# Altium PCB Copy of PCB1.PcbDoc
Units mm, origin at the board's own origin, x right, y up, seen from the top; angles counter-clockwise.
Board outline 75 x 30 mm, 2 copper layers (Top Layer, Bottom Layer); 15 components, 9 nets, 61 pads, 11 vias.
Unrouted connection lines stored in the file: 8.
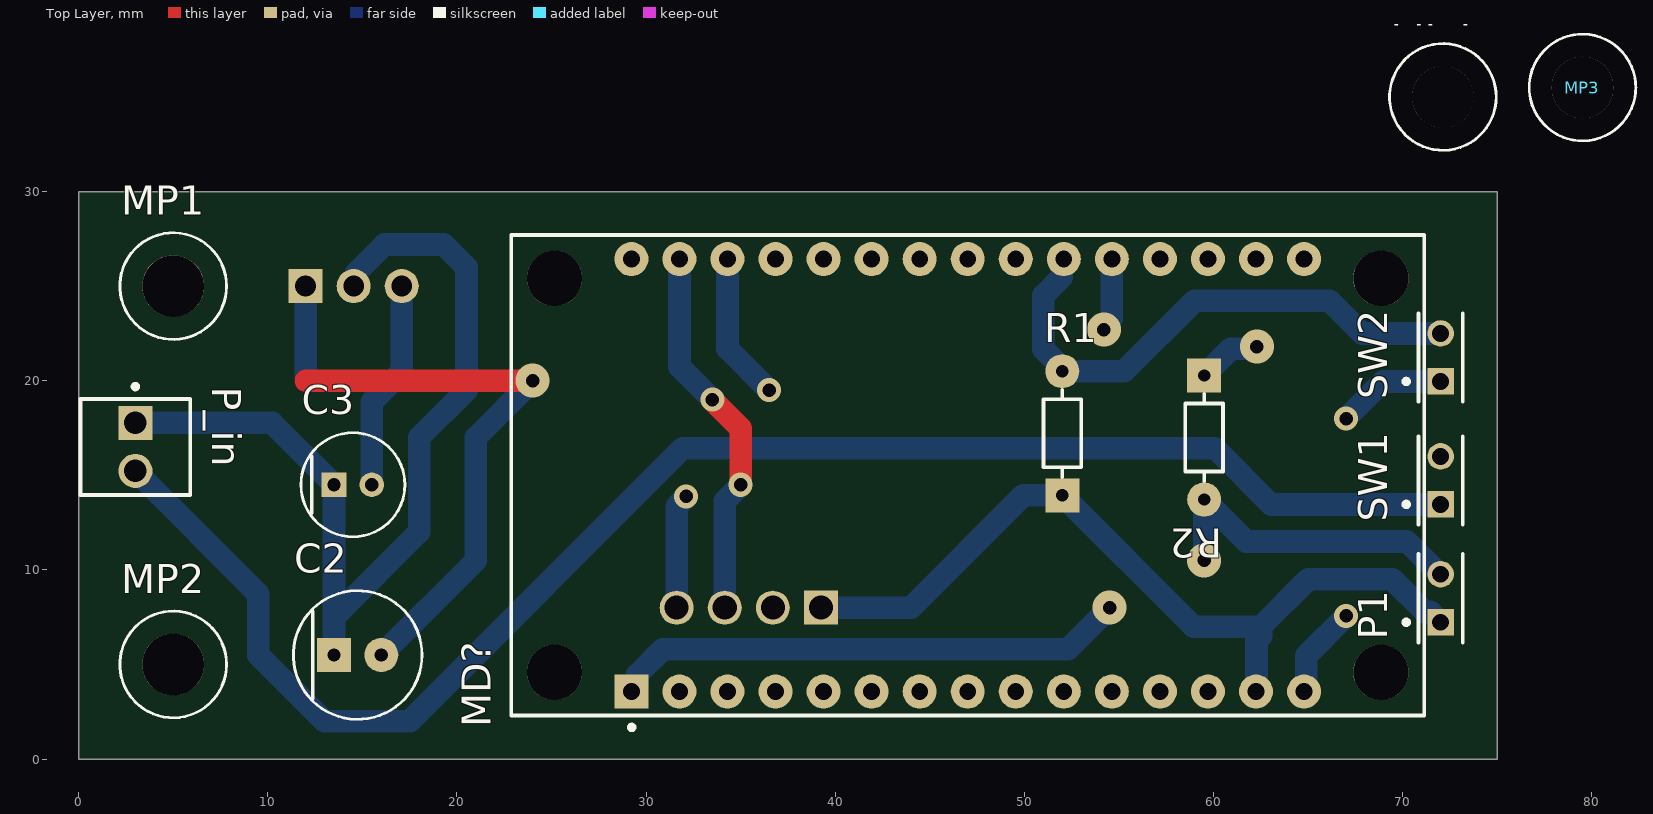
[diagram p0: Top Layer view]
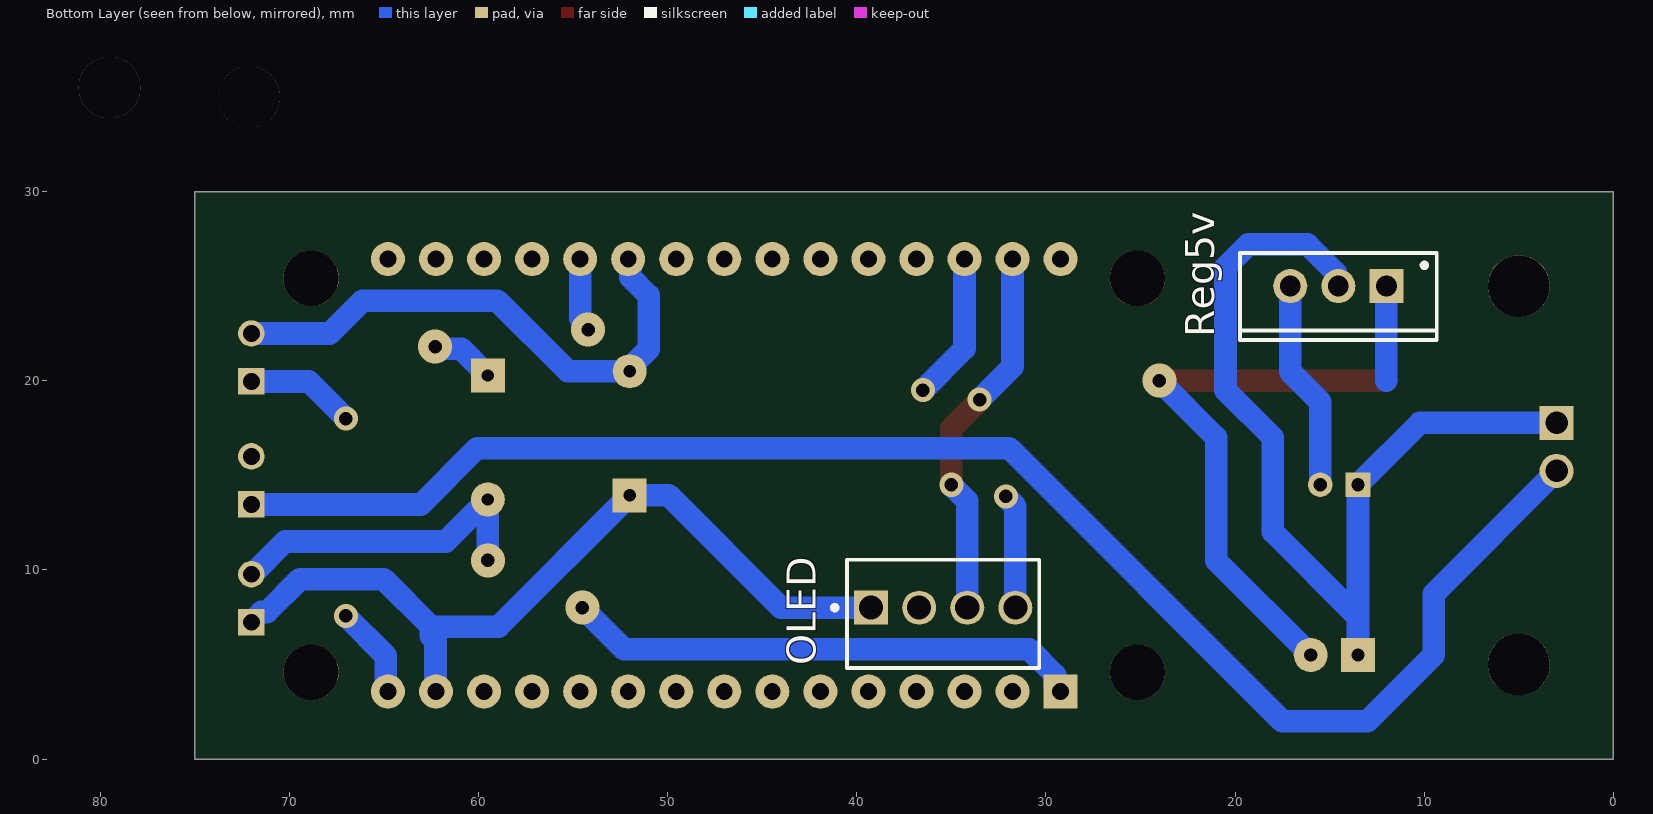
[diagram p1: Bottom Layer view, seen from below]

## Layer stack, top to bottom
Top Solder: solder mask 0.0102, Solder Resist, Dk 3.5
Top Layer: signal copper 0.0356
Dielectric 1: dielectric 0.32, FR-4, Dk 4.8
Bottom Layer: signal copper 0.0356
Bottom Solder: solder mask 0.0102, Solder Resist, Dk 3.5

## Board outline
0,0 75,0 75,30 0,30

## Design rules (kind name [scope] priority, off if disabled: settings)
Clearance [All] p1: gap=0.7 ignorepadtopadclearanceinfootprint=FALSE
PolygonConnect [All] p1: connectstyle=Relief reliefconductorwidth=0.254 reliefentries=4 polygonreliefangle="90 Angle" airgapwidth=0.254
RoutingVias [All] p1: holewidth=0.711 width=1.27 viastyle="Through Hole" minholewidth=0.711 minwidth=1.27 maxholewidth=0.711 maxwidth=1.27
SolderMaskExpansion [All] p1: expansion=0.102 istentingtop=FALSE
Width [All] p1: maxlimit=2 minlimit=1 preferedwidth=1.2
30 further rules are at their usual default settings.

## Components (designator, comment, footprint, x,y, rotation, side; value= is the part's Value field where it differs from the comment)
C2 "4.7uF" FP-RAD-TH-D_6_3_0_5-L_11-MFG 14.75,5.5 r0 top
C3 "10uF" FP-RAD-TH-D_5_0_5-L_11_1-MFG 14.5,14.5 r0 top
MD? "113990105" FP-113990105-MFG 47,15 r90 top
MP1 "9901" FP-9901-MFG 5,25 r0 top
MP2 "9901" FP-9901-MFG 5,5 r0 top
MP3 "9901" FP-9901-MFG 79.5,35.5 r0 top
MP4 "9901" FP-9901-MFG 72.119,35 r0 top
OLED "6" TECO-640456-4 35.426,8 r0 bottom
P1 "5-146280-2" TECO-5-146280-2_V 72,8.5 r90 top
P_in "9V" MOLX-22-27-2021_V 3,16.5 r270 top
R1 "10k" FP-CF18-MFG 52,17.22 r90 top value=10kΩ
R2 "10k" FP-CF18-MFG 59.5,17 r270 top value=10kΩ
Reg5v "5V" TO220 14.54,25 r0 bottom
SW1 "5-146280-2" TECO-5-146280-2_V 72,14.73 r90 top
SW2 "5-146280-2" TECO-5-146280-2_V 72,21.23 r90 top

## Footprints (in the part's own frame and the unit in brackets; to place one, negate y for a bottom-side part, rotate by r counter-clockwise, add the part's x,y. Pads: shape width x height; smd on the part's side, far side on the other; paste and mask are expansions set on the pad)
FP-9901-MFG [mil]
  round 128.5 hole 128.5 unplated paste-39370.1 mask+0: ""(0,0)
  silkscreen extent -111,-111 111,111, body extent -115,-115 115,115, height 10
FP-113990105-MFG [mm]
  rect 1.8x1.8 hole 0.889 paste-1000 mask+0: 1(-11.43,17.78)
  round 1.8 hole 0.889 paste-1000 mask+0: 2(-11.43,15.24) 3(-11.43,12.7) 4(-11.43,10.16) 5(-11.43,7.62) 6(-11.43,5.08) 7(-11.43,2.54) 8(-11.43,0) 9(-11.43,-2.54) 10(-11.43,-5.08) 11(-11.43,-7.62) 12(-11.43,-10.16) 13(-11.43,-12.7) 14(-11.43,-15.24) 15(-11.43,-17.78) 16(11.43,-17.78) 17(11.43,-15.24) 18(11.43,-12.7) 19(11.43,-10.16) 20(11.43,-7.62) 21(11.43,-5.08) 22(11.43,-2.54) 23(11.43,0) 24(11.43,2.54) 25(11.43,5.08) 26(11.43,7.62) 27(11.43,10.16) 28(11.43,12.7) 29(11.43,15.24) 30(11.43,17.78)
  round 2.921 hole 2.921 unplated paste-1000 mask+0: ""(-10.414,21.844) ""(-10.414,-21.844) ""(10.414,21.844) ""(10.414,-21.844)
  silkscreen extent -13.45,-24.13 12.7,24.13, body extent -12.99,-24.85 12.99,24.34, height 0.25
FP-CF18-MFG [mm]
  rect 1.8x1.8 hole 0.65 paste-1000 mask+0: 1(-3.28,0)
  round 1.8 hole 0.65 paste-1000 mask+0: 2(3.28,0)
  silkscreen extent -2.3,-1 2.3,1, body extent -3.96,-1.1 3.96,1.1, height 0.25
FP-RAD-TH-D_5_0_5-L_11_1-MFG [mm]
  rect 1.3x1.3 hole 0.7 paste-1000 mask+0: 1(-1,0)
  round 1.3 hole 0.7 paste-1000 mask+0: 2(1,0)
  silkscreen extent -2.75,-2.75 2.75,2.75, body extent -2.85,-2.85 2.85,2.85, height 0.25
FP-RAD-TH-D_6_3_0_5-L_11-MFG [mm]
  rect 1.8x1.8 hole 0.7 paste-1000 mask+0: 1(-1.25,0)
  round 1.8 hole 0.7 paste-1000 mask+0: 2(1.25,0)
  silkscreen extent -3.4,-3.4 3.4,3.4, body extent -3.5,-3.5 3.5,3.5, height 0.25
MOLX-22-27-2021_V [mm] "Header, 2-Leads, Body 5.8x5.08mm"
  rect 1.8x1.8 hole 1.19: 1(-1.27,0)
  round 1.8 hole 1.19: 2(1.27,0)
  silkscreen extent -3.31,-2.9 2.54,2.9, body extent -2.54,-2.9 2.54,2.9, height 11.72
TECO-5-146280-2_V [mm] "Connector, 2-Leads, Body 4.67x2.34mm, Pitch 2.54mm"
  rect 1.4x1.4 hole 0.89: 1(-1.27,0)
  round 1.4 hole 0.89: 2(1.27,0)
  silkscreen extent -2.33,-1.17 2.33,1.94, body extent -2.34,-1.17 2.34,1.17, height 5.33
TECO-640456-4 [mm]
  rect 1.8x1.8 hole 1.27 paste+0: 1(3.81,0)
  round 1.8 hole 1.27 paste+0: 2(1.27,0) 3(-1.27,0) 4(-3.81,0)
  silkscreen extent -5.08,-2.54 5.86,3.18
TO220 [mm] "TO, Thru-Hole, Vertical, Heatsink Mounted; 3 In-Line Leads; Pitch 2.54 mm"
  rect 1.8x1.8 hole 1.1: 1(-2.54,0)
  round 1.8 hole 1.1: 2(0,0) 3(2.54,0)
  silkscreen extent -5.2,-1.75 5.2,2.85, body extent -5.25,-1.8 5.25,2.9, height 19.7

## Part data
C2: library part CMP-05427-000237-1, "Aluminum Electrolytic Capacitors (Radial Lead Type) 4.7uF ±20% 160V", Case/Package=Radial, Dielectric Material=Aluminium, Max Operating Temperature=105°C, Min Operating Temperature=-25°C, Package Quantity=200, Ripple Current=43mA, Tolerance=20%, Voltage=160V, Capacitance=4.7uF, Construction=RADIAL, Diameter=6.3mm, Dissipation Factor=0.15%, Height=11.2mm, Height - Seated (Max)=0.48inch, Lead Diameter=0.5mm, Lead Free="Lead Free", Lead Pitch=2.5mm, Lead/Base Style=Straight, Length=11.2mm, Life (Hours)=2000Hour, Mount="Through Hole", Number of Pins=2, Packaging=Bulk, Radiation Hardening=No, REACH SVHC="No SVHC", Ripple Current (AC)=43mA, RoHS Compliant=Yes, Series=NHG, Termination=Radial, Voltage Rating=160V, Voltage Rating (DC)=160V, Weight=0.01lb, Width=0.25inch
C3: library part CMP-05427-000869-1, "Aluminum Electrolytic Capacitors (Radial Lead Type) 10uF ±20% 100V", Case/Package=Radial, Dielectric Material=Aluminium, Leakage Current=3uA, Max Operating Temperature=85°C, Min Operating Temperature=-40°C, Package Quantity=200, Ripple Current=70mA, Tolerance=20%, Voltage=100V, Capacitance=10uF, Construction=RADIAL, Contact Plating=Tin, Diameter=5mm, Dissipation Factor=0.1%, Height=11mm, Height - Seated (Max)=0.472inch, Lead Diameter=0.5mm, Lead Free="Lead Free", Lead Pitch=2mm, Lead/Base Style=Straight, Length=11mm, Life (Hours)=2000Hour, Mount="Through Hole", Number of Pins=2, Packaging=Bulk, Polarity=Polar, Radiation Hardening=No, REACH SVHC="No SVHC", Ripple Current (AC)=70mA, RoHS Compliant=Yes, Series=M, Termination=Radial, Voltage Rating=100V, Voltage Rating (DC)=100V, Width=5mm
MD?: library part CMP-138991-000001-1, "NODEMCU V2 LUA BASED ESP8266 DEV", Frequency=2.4GHz, Series=-
MP1 MP2 MP3 MP4: library part CMP-19664-000002-1, "MACHINE SCREW PAN PHILLIPS 4-40", Package Quantity=100, Head Height=0.065inch, Lead Free="Lead Free", Length=0.44inch, Material="Stainless Steel", Mount=Screw, Outside Diameter=0.212inch, Series=-, Thread Size=#4-40
OLED: library part CMP-2000-05419-1, "Male Header, Pitch 2.54 mm, 1 x 4 Position, Height 10.03 mm, Tail Length 3.56 mm, RoHS, Bulk", Color=White, Current, Rating="5 /  / A", Flammability Rating=UL94V-0, Manufacturer="TE Connectivity", Manufacturer Part Number=640456-4, Temperature, Operating="-55to+105 /  / degC", Voltage, Rating="250 /  / V", Agency Approvals=CSA,UL, Angle=Straight, Brand/Series=MTA-100Series, Color, Housing=White, Connector Type=MTA-100, Contact Centerline Spacing="0.100 /  / in.", Contact Mating Area Plating=Tin, Contact Plating=Tin, Contact Shape=Square, Contact Termination Area Plating=Tin, Datasheet URL=https://datasheet.ciiva.com/16286/eng-ds-82056-mta-0608-16286228.pdf, Datasheet Version=Dec-14, Length, Overall="0.4 /  / \"", Length, Pin="0.14 /  / \"", Length, Terminal Post="0.14 /  / in.", Manufacturer URL=http://www.te.com/, Material, Contact=CopperAlloy, Material, Housing=Polyester, Mount Angle=Vertical, Mounting Hole Size="0.04 /  / \"", Mounting Type=PCMount, Number of Contacts=4, Number of Positions=4, Number of Rows=1, Pin Spacing="0.1 /  / \"", Primary Type=InterconnectSystem, Size, Post="0.025 /  / in.", Special Features=Pinstrip, Standards=RoHSCompliant,ELVCompliant,UL94V-0, Termination=Solder, Type=PCBPlug
P1 SW1 SW2: library part CMP-2000-07492-1, "Male Header, Pitch 2.54 mm, 1 x 2 Position, Height 8.21 mm, Tail Length 3.05 mm, -65 to 105 degC, RoHS, Bulk", Case\/Package=100, Colour=Black, Current Rating=3A, Flammability Rating=UL94V-0, High Temperature Housing=Yes, Manufacturer="TE Connectivity", Max Current Rating=5A, Max Operating Temperature=105degC, Min Operating Temperature=-65degC, Package Description="Male Header, Pitch 2.54 mm, 1 x 2 Position, Height 8.21 mm, Tail Length 3.05 mm", Package Quantity=500, Approvals=CSA, Board Standoff=No(Without), Connector Type=Header, Contact Gender=Male, Contact Material=CopperAlloy, Contact Mating Length=0.23inch, Contact Plating=Matte, Contact Protection=No(Without), Contact Shape=Square, Datasheet URL=http://www.te.com/commerce/DocumentDelivery/DDEController?Action=showdoc&DocId=Customer+Drawing%7F146280%7FH1%7Fpdf%7FEnglish%7FENG_CD_146280_H1.pdf%7F5-146280-2, Datasheet Version="Rev. H1, 08/2016", Depth=2.34mm, Gasket=No(Without), High Speed Serial Data Connector=No, Housing Colour=Black, Housing material=Polymer, Keyed=No, Length=4.67mm, Manufacturer URL=http://www.te.com/, Mating Alignment=No(Without), Mating Connector Lock=No(Without), Mating Post Length=0.23inch, Mount=ThroughHole, Mounting Technology=ThroughHole, Number of Contacts=2, Number of Positions=2, Number of Rows=1, Orientation=Straight, Package Reference=5-146280-2, Packaging=Carton, Panel Mount Retention=No(Without), PCB Mount Retention=Without, PCB Mounting Orientation=Vertical, PCB Thickness=0.063inch, Pitch=2.54mm, Radiation Hardening=No, RoHSCompliant=true, Row Spacing=2.54mm, Selectively Loaded=No(Without), Stabilizers=No(Without), Termination=ThroughHole, Termination Post Length=0.12inch
P_in: library part CMP-2000-05537-1, "Male Header, Pitch 2.54 mm, 1 x 2 Position, Height 11.7 mm, Tail Length 3.56 mm, 0 to 75 degC, RoHS, Bulk", Current - Max=4A, Manufacturer=Molex, Operating Temperature=0°Cto+75°C, Package Description="2-Leads Header, Body 5.08 x 5.8 mm, Pitch 2.54 mm", Package Reference=22-27-2021, Package Version="Rev. BC, 02/2012", PartNumber=0022272021, Voltage - Max=250V, Contact Material=Tinplatedbrass, Current Rating=4A, Datasheet URL=http://www.molex.com/pdm_docs/sd/022272021_sd.pdf, Datasheet Version="Rev. F, 06/2009", Housing material=Nylon(UL94V-0), Manufacturer URL=http://www.molex.com/, Mounting Technology=ThroughHole, No. of Positions=2, No. of Rows=1, Orientation=Vertical, Pitch=2.54mm, Voltage Rating=250V
R1 R2: library part CMP-26528-000002-1, "RES 10K OHM 1/8W 5% CF AXIAL", Manufacturer="Stackpole Electronics", Manufacturer Part Number=CF18JT10K0, Package=CF18, Power Rating=0.125W, Resistance=10kΩ, Temperature="-55°C to +155°C", Temperature Coefficient=0-500ppm/°C, Temperature Range High=+155°C, Temperature Range Low=-55°C, Tolerance=5%, Voltage Rating=250V, Automotive=No, Category=Res, ComponentLink2Description=Datasheet, ComponentLink2URL=http://www.seielect.com/Catalog/SEI-CF_CFM.pdf, Composition="Carbon Film", Device Class L1="Passive Components", Device Class L2=Resistors, Device Class L3="Through-Hole Resistors", Digikey Description="RES 10K OHM 1/8W 5% CF AXIAL", Height=2mm, Ipc Land Pattern Name=RESAD656W65L360D200, Lead Free=Yes, Octopart=https://octopart.com/cf18jt10k0-stackpole+electronics-19205642, RoHS=TRUE, Series=CF
Reg5v: library part CMP-0244-00495-1, "Positive Voltage Regulator, 6V, 3-Pin TO-220", ComponentLink1Description="Manufacturer URL", ComponentLink1URL=http://www.st.com, ComponentLink2Description=Datasheet, ComponentLink2URL=http://www.st.com/internet/com/TECHNICAL_RESOURCES/TECHNICAL_LITERATURE/DATASHEET/CD00000444.pdf, ComponentLink3Description="Package Specification", ComponentLink3URL=http://www.st.com/internet/com/TECHNICAL_RESOURCES/TECHNICAL_LITERATURE/PACKAGE_INFORMATION/CD00004649.pdf, DatasheetVersion=16/11/2011, PackageDescription="TO, Thru-Hole, Vertical, Heatsink Mounted; 3 In-Line Leads; Pitch 2.54 mm", PackageReference=TO220, PackageVersion=ver3.0

## Via types
v1: diameter 1.27, hole 0.711, Top Layer to Bottom Layer, 6 vias
v2: diameter 1.8, hole 0.711, Top Layer to Bottom Layer, 5 vias

## Nets (pads, with @x,y where several pads share a name; then routed paths per layer and width w, separated by ;. In a path a pad name is that pad's centre, name@x,y a point inside that pad or via, vN(x,y) a via of type N, cw(c..) or ccw(c..) an arc to the next point about the centre after c; other vN are vias at no path point)
5V: C3.2 MD?.15 OLED.2 Reg5v.3 SW2.1 | length 21.9
  Bottom Layer w1.2: C3.2 15.5,18.892 17.08,20.472 Reg5v.3 ; MD?.15 64.895,3.685 64.895,5.46 v1(67,7.565) ; v1(67,18) 68.96,19.96 SW2.1
A0: MD?.1 P1.2 R2.2 | length 44.8
  Bottom Layer w1.2: MD?.1 29.52,3.87 29.52,4.441 30.879,5.8 52.3,5.8 v2(54.5,8) ; v2(59.5,10.5) R2.2 61.72,11.5 70.216,11.5 71.946,9.77 P1.2
D1: MD?.29 OLED.3 | length 20.1
  Top Layer w1.2: v1(33.5,19) 33.5,18.981 35,17.481 v1(35,14.5)
  Bottom Layer w1.2: MD?.29 31.76,20.74 v1(33.5,19) ; OLED.3 34.156,13.637 35,14.481 v1(35,14.5)
D2: MD?.28 OLED.4 | length 13.9
  Bottom Layer w1.2: OLED.4 31.616,13.361 32.118,13.863 v1(32.118,13.882) ; MD?.28 34.3,21.7 v1(36.5,19.5)
D8: MD?.20 R2.1 | length 7.3
  Bottom Layer w1.2: v2(54.198,22.7) 54.198,22.862 54.62,23.284 MD?.20 ; R2.1 60.905,21.685 62.166,21.685 v2(62.281,21.8)
GND: C2.1 C3.1 MD?.14 OLED.1 P1.1 P_in.1 R1.1 Reg5v.2 | length 94
  Bottom Layer w1.2: P_in.1 10.23,17.77 C3.1 13.5,7.5 ; C2.1@13.8,5.8 C2.1 13.5,7.5 ; Reg5v.2 14.655,25.115 14.655,25.686 16.169,27.2 19.3,27.2 20.5,26 20.5,19.5 18,17 18,12 13.5,7.5 ; OLED.1 44,8 49.94,13.94 R1.1 58.94,7 62.5,7 ; MD?.14 62.27,3.6 62.27,6.27 62.5,6.5 62.5,7 ; P1.1 71.46,7.77 71.172,7.77 69.442,9.5 65,9.5 62.5,7
NetMD?_21: MD?.21 R1.2 SW2.2 | length 29.1
  Bottom Layer w1.2: MD?.21 51.965,26.315 51.965,25.465 51,24.5 51,21.662 52,20.662 R1.2 55.27,20.5 59,24.23 66.124,24.23 67.854,22.5 SW2.2
NetP_in_2: P_in.2 SW1.1 | length 83.6
  Bottom Layer w1.2: P_in.2 9.5,8.73 9.5,5.5 13,2 17.5,2 31.935,16.435 60.065,16.435 63.04,13.46 SW1.1
Vin: C2.2 Reg5v.1 SW1.2 | length 34.8
  Top Layer w1.2: 12,20 v2(24,20)
  Bottom Layer w1.2: 12,20 Reg5v.1 ; C2.2 21,10.5 21,17 v2(24,20)
pads on no net: MD?. MD?.2 MD?.3 MD?.4 MD?.5 MD?.6 MD?.7 MD?.8 MD?.9 MD?.10 MD?.11 MD?.12 MD?.13 MD?.16 MD?.17 MD?.18 MD?.19 MD?.22 MD?.23 MD?.24 MD?.25 MD?.26 MD?.27 MD?.30 MP1. MP2. MP3. MP4.